# Altium PCB FOOTPRINT FOR UPPER PART V1.pcbdoc
Units mil, origin at the board's own origin, x right, y up, seen from the top; angles counter-clockwise.
Board outline 3689 x 6257.1 mil, 2 copper layers (Top Layer, Bottom Layer), stack 62.2 mil thick; 1 components, 0 nets, 0 pads, 0 vias.
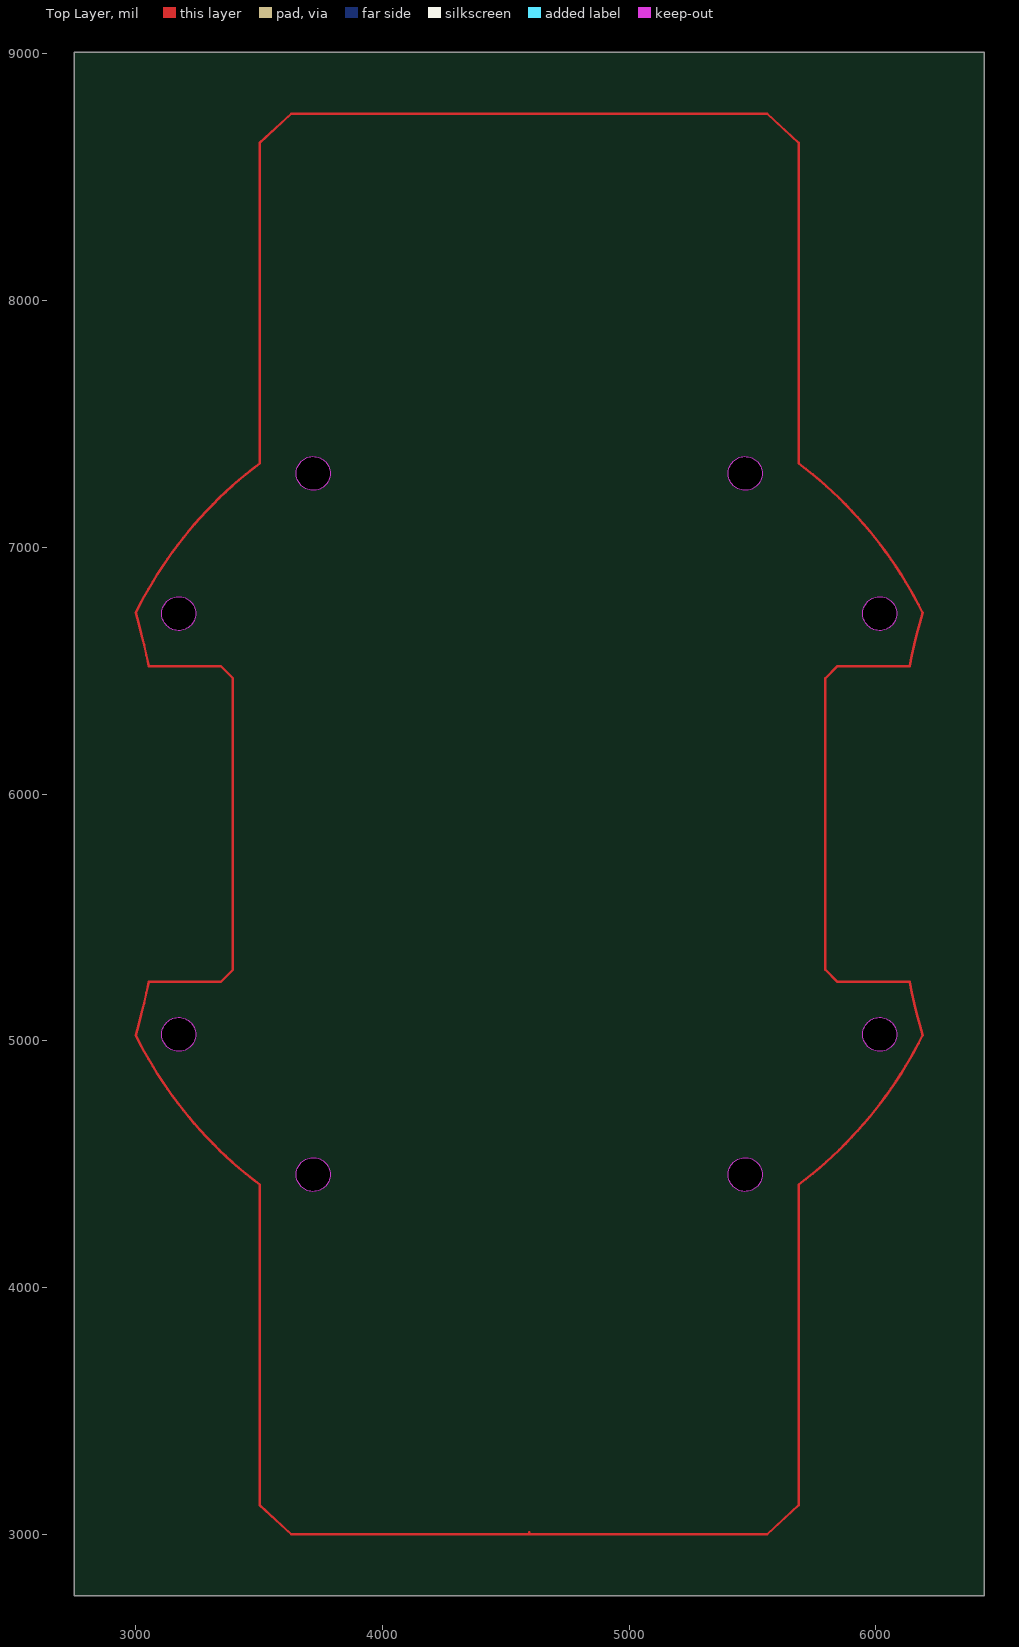
[diagram p0: Top Layer view]
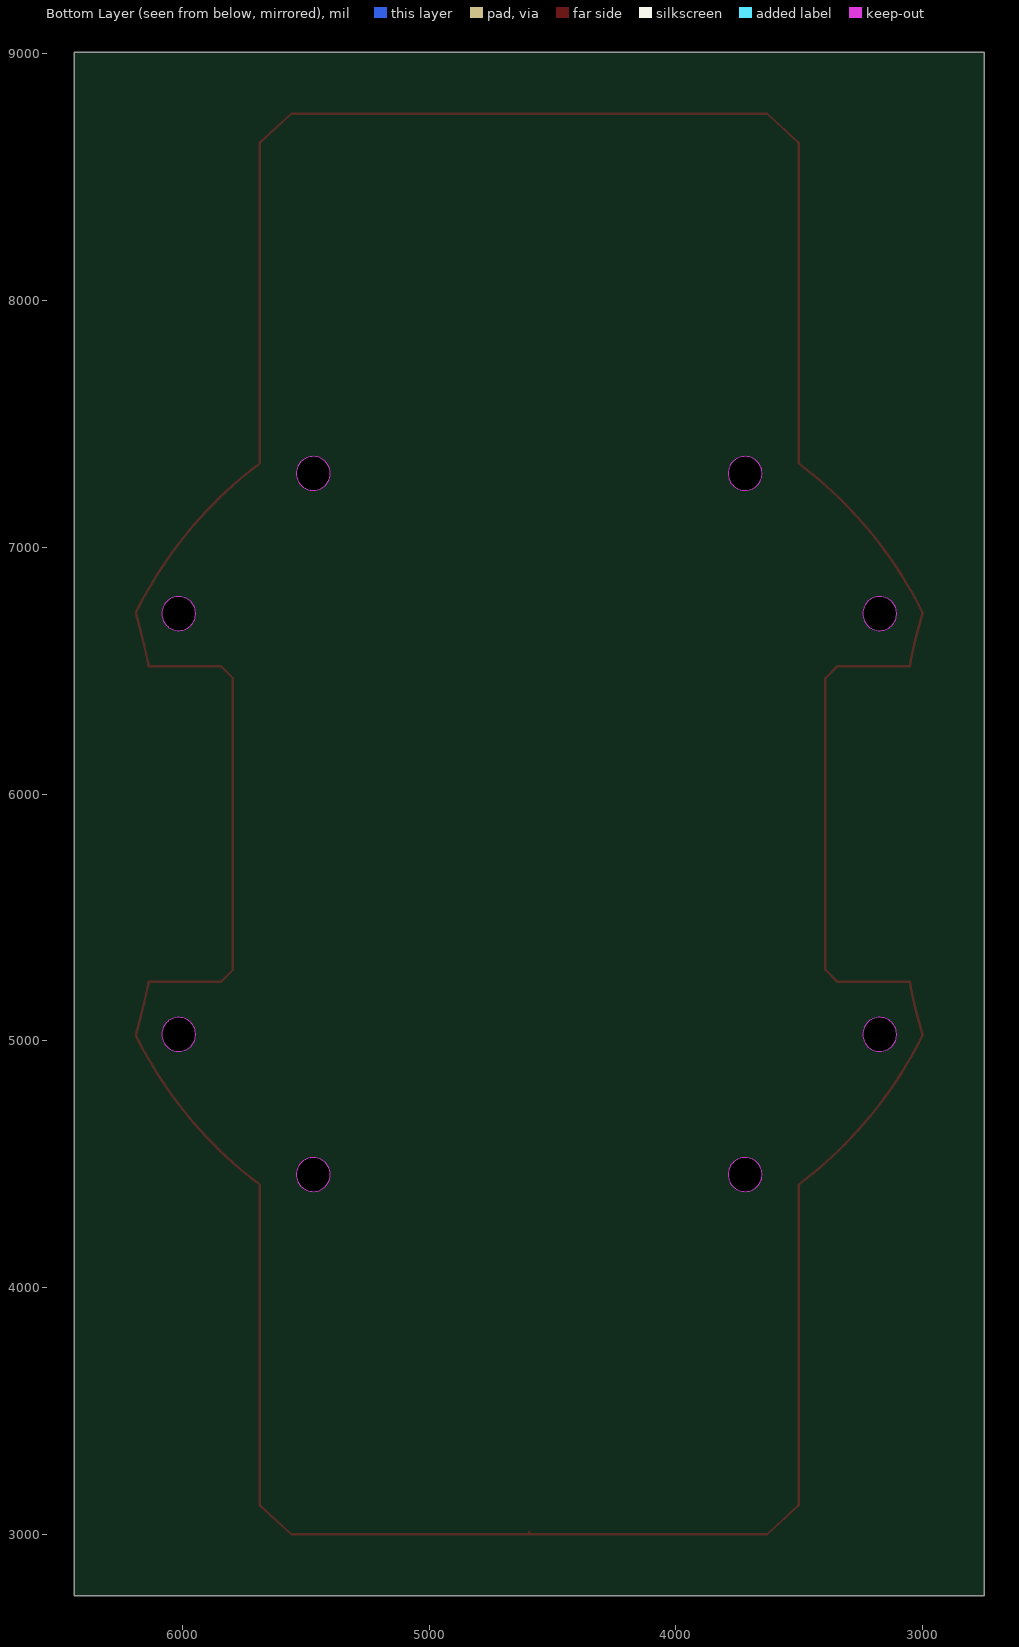
[diagram p1: Bottom Layer view, seen from below]

## Layer stack, top to bottom
Top Solder Mask Layer: solder mask 0.4, Dk 3.3
Top Layer: signal copper 1.4
Dielectric1: surface 59.4, FR4, Dk 4.5
Bottom Layer: signal copper 1.4
Bottom Solder Mask Layer: solder mask 0.4, Dk 3.3

## Board outline
6439,2750 2750,2750 2750,9007.1 6439,9007.1

## Components (designator, comment, footprint, x,y, rotation, side; value= is the part's Value field where it differs from the comment)
? "" "FOOTPRINT FOR UPPER PART V1" 4043.7,7478 r0 top

## Footprints (in the part's own frame and the unit in brackets; to place one, negate y for a bottom-side part, rotate by r counter-clockwise, add the part's x,y. Pads: shape width x height; smd on the part's side, far side on the other; paste and mask are expansions set on the pad)
"FOOTPRINT FOR UPPER PART V1" [mil]
  Top Layer lines w10: 550.8,-4469.7 550.8,-4478 ; 550.8,-4478 1515.4,-4478 1643.3,-4359.9 1643.3,-3060.7 1671.9,-3038.7 1700,-3016.1 1727.6,-2992.9 1754.7,-2969.2 1781.4,-2944.9 1807.4,-2920 1833,-2894.6 1858,-2868.6 1882.5,-2842.1 1906.4,-2815.1 1929.7,-2787.6 1952.4,-2759.6 1974.6,-2731.1 1996.1,-2702.2 2017,-2672.8 2037.3,-2643 2056.9,-2612.8 2075.9,-2582.1 2094.2,-2551.1 2111.9,-2519.7 2128.9,-2487.9 2145.3,-2455.8 2133.5,-2412.8 2122.4,-2369.6 2111.8,-2326.3 2101.9,-2282.8 2092.5,-2239.2 1800.8,-2239.2 1751.6,-2190 1751.6,-1599.5 1751.6,-1008.9 1800.8,-959.7 2092.5,-959.7 2101.9,-916.1 2111.8,-872.6 2122.3,-829.3 2133.5,-786.2 2145.3,-743.2 2128.9,-711 2111.9,-679.2 2094.2,-647.8 2075.9,-616.8 2056.9,-586.1 2037.3,-555.9 2017,-526.1 1996.1,-496.7 1974.6,-467.8 1952.4,-439.3 1929.7,-411.3 1906.4,-383.8 1882.5,-356.8 1858,-330.3 1833,-304.4 1807.4,-278.9 1781.4,-254.1 1754.7,-229.7 1727.6,-206 1700,-182.8 1671.9,-160.2 1643.3,-138.2 1643.3,1161 1515.4,1279.1 550.8,1279.1 -413.8,1279.1 -541.7,1161 -541.7,-138.2 -570.3,-160.2 -598.4,-182.8 -626,-206 -653.2,-229.7 -679.8,-254.1 -705.9,-278.9 -731.4,-304.4 -756.4,-330.3 -780.9,-356.8 -804.8,-383.8 -828.1,-411.3 -850.9,-439.3 -873,-467.8 -894.5,-496.7 -915.4,-526.1 -935.7,-555.9 -955.3,-586.1 -974.3,-616.8 -992.7,-647.8 -1010.4,-679.2 -1027.4,-711 -1043.7,-743.2 -1031.9,-786.2 -1020.8,-829.3 -1010.2,-872.6 -1000.3,-916.1 -990.9,-959.7 -699.2,-959.7 -650,-1008.9 -650,-1599.5 -650,-2190 -699.2,-2239.2 -990.9,-2239.2 -1000.3,-2282.8 -1010.2,-2326.3 -1020.8,-2369.6 -1031.9,-2412.8 -1043.7,-2455.8 -1027.3,-2487.9 -1010.3,-2519.7 -992.6,-2551.1 -974.3,-2582.1 -955.3,-2612.8 -935.6,-2643 -915.3,-2672.8 -894.4,-2702.2 -872.9,-2731.1 -850.8,-2759.5 -828,-2787.5 -804.7,-2815 -780.8,-2842 -756.4,-2868.5 -731.4,-2894.5 -705.8,-2919.9 -679.7,-2944.8 -653.1,-2969.1 -626,-2992.9 -598.4,-3016.1 -570.3,-3038.7 -541.7,-3060.7 -541.7,-4359.9 -413.8,-4478 550.8,-4478
  Board Outline Layer lines w0.1: -938.5,-2455.9 -937.7,-2463.2 -936.2,-2470.4 -933.9,-2477.3 -930.9,-2484 -927.1,-2490.3 -922.8,-2496.2 -917.8,-2501.6 -912.3,-2506.4 -906.3,-2510.6 -899.8,-2514.2 -893.1,-2517 -886.1,-2519.2 -878.9,-2520.5 -871.6,-2521.1 -864.2,-2520.9 -857,-2519.9 -849.8,-2518.2 -842.9,-2515.7 -836.3,-2512.5 -830.1,-2508.6 -824.3,-2504.1 -819.1,-2499 -814.4,-2493.3 -810.4,-2487.2 -807,-2480.7 -804.3,-2473.9 -802.4,-2466.8 -801.2,-2459.6 -800.8,-2452.2 -801.2,-2444.9 -802.4,-2437.7 -804.3,-2430.6 -807,-2423.8 -810.4,-2417.3 -814.4,-2411.1 -819.1,-2405.5 -824.3,-2400.4 -830.1,-2395.8 -836.3,-2392 -842.9,-2388.8 -849.8,-2386.3 -857,-2384.5 -864.2,-2383.6 -871.6,-2383.4 -878.9,-2383.9 -886.1,-2385.3 -893.1,-2387.4 -899.8,-2390.3 -906.3,-2393.8 -912.3,-2398 -917.8,-2402.9 -922.8,-2408.3 -927.1,-2414.1 -930.9,-2420.5 -933.9,-2427.1 -936.2,-2434.1 -937.7,-2441.3 -938.5,-2448.6 -938.5,-2455.9 ; -938.5,-750.4 -937.7,-757.6 -936.2,-764.8 -933.9,-771.8 -930.9,-778.5 -927.1,-784.8 -922.8,-790.7 -917.8,-796 -912.3,-800.9 -906.3,-805.1 -899.8,-808.6 -893.1,-811.5 -886.1,-813.6 -878.9,-815 -871.6,-815.6 -864.2,-815.4 -857,-814.4 -849.8,-812.6 -842.9,-810.2 -836.3,-807 -830.1,-803.1 -824.3,-798.5 -819.1,-793.4 -814.4,-787.8 -810.4,-781.7 -807,-775.2 -804.3,-768.3 -802.4,-761.2 -801.2,-754 -800.8,-746.7 -801.2,-739.4 -802.4,-732.1 -804.3,-725 -807,-718.2 -810.4,-711.7 -814.4,-705.6 -819.1,-700 -824.3,-694.8 -830.1,-690.3 -836.3,-686.4 -842.9,-683.2 -849.8,-680.7 -857,-679 -864.2,-678 -871.6,-677.8 -878.9,-678.4 -886.1,-679.8 -893.1,-681.9 -899.8,-684.7 -906.3,-688.3 -912.3,-692.5 -917.8,-697.3 -922.8,-702.7 -927.1,-708.6 -930.9,-714.9 -933.9,-721.6 -936.2,-728.6 -937.7,-735.7 -938.5,-743 -938.5,-750.4 ; -393.2,-3023.9 -392.4,-3031.2 -390.9,-3038.4 -388.6,-3045.3 -385.6,-3052 -381.8,-3058.3 -377.5,-3064.2 -372.5,-3069.6 -367,-3074.4 -361,-3078.7 -354.5,-3082.2 -347.8,-3085.1 -340.8,-3087.2 -333.6,-3088.5 -326.2,-3089.1 -318.9,-3088.9 -311.6,-3088 -304.5,-3086.2 -297.6,-3083.7 -291,-3080.5 -284.8,-3076.6 -279,-3072.1 -273.8,-3067 -269.1,-3061.3 -265.1,-3055.2 -261.7,-3048.7 -259,-3041.9 -257.1,-3034.8 -255.9,-3027.6 -255.5,-3020.2 -255.9,-3012.9 -257.1,-3005.7 -259,-2998.6 -261.7,-2991.8 -265.1,-2985.3 -269.1,-2979.2 -273.8,-2973.5 -279,-2968.4 -284.8,-2963.9 -291,-2960 -297.6,-2956.8 -304.5,-2954.3 -311.6,-2952.5 -318.9,-2951.6 -326.2,-2951.4 -333.6,-2952 -340.8,-2953.3 -347.8,-2955.4 -354.5,-2958.3 -361,-2961.8 -367,-2966.1 -372.5,-2970.9 -377.5,-2976.3 -381.8,-2982.2 -385.6,-2988.5 -388.6,-2995.2 -390.9,-3002.1 -392.4,-3009.3 -393.2,-3016.6 -393.2,-3023.9 ; -393.2,-182.3 -392.4,-189.6 -390.9,-196.8 -388.6,-203.8 -385.6,-210.4 -381.8,-216.8 -377.5,-222.6 -372.5,-228 -367,-232.9 -361,-237.1 -354.5,-240.6 -347.8,-243.5 -340.8,-245.6 -333.6,-247 -326.2,-247.5 -318.9,-247.3 -311.6,-246.4 -304.5,-244.6 -297.6,-242.1 -291,-238.9 -284.8,-235 -279,-230.5 -273.8,-225.4 -269.1,-219.8 -265.1,-213.6 -261.7,-207.1 -259,-200.3 -257.1,-193.2 -255.9,-186 -255.5,-178.7 -255.9,-171.3 -257.1,-164.1 -259,-157 -261.7,-150.2 -265.1,-143.7 -269.1,-137.6 -273.8,-131.9 -279,-126.8 -284.8,-122.3 -291,-118.4 -297.6,-115.2 -304.5,-112.7 -311.6,-111 -318.9,-110 -326.2,-109.8 -333.6,-110.4 -340.8,-111.7 -347.8,-113.9 -354.5,-116.7 -361,-120.3 -367,-124.5 -372.5,-129.3 -377.5,-134.7 -381.8,-140.6 -385.6,-146.9 -388.6,-153.6 -390.9,-160.5 -392.4,-167.7 -393.2,-175 -393.2,-182.3 ; 1357.2,-3023.9 1358,-3031.2 1359.5,-3038.4 1361.8,-3045.3 1364.9,-3052 1368.6,-3058.3 1373,-3064.2 1377.9,-3069.6 1383.4,-3074.4 1389.4,-3078.7 1395.9,-3082.2 1402.6,-3085.1 1409.6,-3087.2 1416.8,-3088.5 1424.2,-3089.1 1431.5,-3088.9 1438.8,-3088 1445.9,-3086.2 1452.8,-3083.7 1459.4,-3080.5 1465.6,-3076.6 1471.4,-3072.1 1476.6,-3067 1481.3,-3061.3 1485.4,-3055.2 1488.7,-3048.7 1491.4,-3041.9 1493.3,-3034.8 1494.5,-3027.6 1494.9,-3020.2 1494.5,-3012.9 1493.3,-3005.7 1491.4,-2998.6 1488.7,-2991.8 1485.4,-2985.3 1481.3,-2979.2 1476.6,-2973.5 1471.4,-2968.4 1465.6,-2963.9 1459.4,-2960 1452.8,-2956.8 1445.9,-2954.3 1438.8,-2952.5 1431.5,-2951.6 1424.2,-2951.4 1416.8,-2952 1409.6,-2953.3 1402.6,-2955.4 1395.9,-2958.3 1389.4,-2961.8 1383.4,-2966.1 1377.9,-2970.9 1373,-2976.3 1368.6,-2982.2 1364.9,-2988.5 1361.8,-2995.2 1359.5,-3002.1 1358,-3009.3 1357.2,-3016.6 1357.2,-3023.9 ; 1357.2,-182.3 1358,-189.6 1359.5,-196.8 1361.8,-203.8 1364.9,-210.4 1368.6,-216.8 1373,-222.6 1377.9,-228 1383.4,-232.9 1389.4,-237.1 1395.9,-240.6 1402.6,-243.5 1409.6,-245.6 1416.8,-247 1424.2,-247.5 1431.5,-247.3 1438.8,-246.4 1445.9,-244.6 1452.8,-242.1 1459.4,-238.9 1465.6,-235 1471.4,-230.5 1476.6,-225.4 1481.3,-219.8 1485.4,-213.6 1488.7,-207.1 1491.4,-200.3 1493.3,-193.2 1494.5,-186 1494.9,-178.7 1494.5,-171.3 1493.3,-164.1 1491.4,-157 1488.7,-150.2 1485.4,-143.7 1481.3,-137.6 1476.6,-131.9 1471.4,-126.8 1465.6,-122.3 1459.4,-118.4 1452.8,-115.2 1445.9,-112.7 1438.8,-111 1431.5,-110 1424.2,-109.8 1416.8,-110.4 1409.6,-111.7 1402.6,-113.9 1395.9,-116.7 1389.4,-120.3 1383.4,-124.5 1377.9,-129.3 1373,-134.7 1368.6,-140.6 1364.9,-146.9 1361.8,-153.6 1359.5,-160.5 1358,-167.7 1357.2,-175 1357.2,-182.3 ; 1902.5,-2455.9 1903.3,-2463.2 1904.8,-2470.4 1907.1,-2477.3 1910.2,-2484 1913.9,-2490.3 1918.3,-2496.2 1923.2,-2501.6 1928.7,-2506.4 1934.7,-2510.6 1941.2,-2514.2 1947.9,-2517 1954.9,-2519.2 1962.1,-2520.5 1969.5,-2521.1 1976.8,-2520.9 1984.1,-2519.9 1991.2,-2518.2 1998.1,-2515.7 2004.7,-2512.5 2010.9,-2508.6 2016.7,-2504.1 2021.9,-2499 2026.6,-2493.3 2030.7,-2487.2 2034,-2480.7 2036.7,-2473.9 2038.6,-2466.8 2039.8,-2459.6 2040.2,-2452.2 2039.8,-2444.9 2038.6,-2437.7 2036.7,-2430.6 2034,-2423.8 2030.7,-2417.3 2026.6,-2411.1 2021.9,-2405.5 2016.7,-2400.4 2010.9,-2395.8 2004.7,-2392 1998.1,-2388.8 1991.2,-2386.3 1984.1,-2384.5 1976.8,-2383.6 1969.5,-2383.4 1962.1,-2383.9 1954.9,-2385.3 1947.9,-2387.4 1941.2,-2390.3 1934.7,-2393.8 1928.7,-2398 1923.2,-2402.9 1918.3,-2408.3 1913.9,-2414.1 1910.2,-2420.5 1907.1,-2427.1 1904.8,-2434.1 1903.3,-2441.3 1902.5,-2448.6 1902.5,-2455.9 ; 1902.5,-750.4 1903.3,-757.6 1904.8,-764.8 1907.1,-771.8 1910.2,-778.5 1913.9,-784.8 1918.3,-790.7 1923.2,-796 1928.7,-800.9 1934.7,-805.1 1941.2,-808.6 1947.9,-811.5 1954.9,-813.6 1962.1,-815 1969.5,-815.6 1976.8,-815.4 1984.1,-814.4 1991.2,-812.6 1998.1,-810.2 2004.7,-807 2010.9,-803.1 2016.7,-798.5 2021.9,-793.4 2026.6,-787.8 2030.7,-781.7 2034,-775.2 2036.7,-768.3 2038.6,-761.2 2039.8,-754 2040.2,-746.7 2039.8,-739.4 2038.6,-732.1 2036.7,-725 2034,-718.2 2030.7,-711.7 2026.6,-705.6 2021.9,-700 2016.7,-694.8 2010.9,-690.3 2004.7,-686.4 1998.1,-683.2 1991.2,-680.7 1984.1,-679 1976.8,-678 1969.5,-677.8 1962.1,-678.4 1954.9,-679.8 1947.9,-681.9 1941.2,-684.7 1934.7,-688.3 1928.7,-692.5 1923.2,-697.3 1918.3,-702.7 1913.9,-708.6 1910.2,-714.9 1907.1,-721.6 1904.8,-728.6 1903.3,-735.7 1902.5,-743 1902.5,-750.4
  Board Outline Layer region: -800.8,-2452.2 -801.2,-2459.6 -802.4,-2466.8 -804.3,-2473.9 -807,-2480.7 -810.4,-2487.2 -814.4,-2493.3 -819.1,-2499 -824.3,-2504.1 -830.1,-2508.6 -836.3,-2512.5 -842.9,-2515.7 -849.8,-2518.2 -857,-2519.9 -864.2,-2520.9 -871.6,-2521.1 -878.9,-2520.5 -886.1,-2519.2 -893.1,-2517 -899.8,-2514.2 -906.3,-2510.6 -912.3,-2506.4 -917.8,-2501.6 -922.8,-2496.2 -927.1,-2490.3 -930.9,-2484 -933.9,-2477.3 -936.2,-2470.4 -937.7,-2463.2 -938.5,-2455.9 -938.5,-2448.6 -937.7,-2441.3 -936.2,-2434.1 -933.9,-2427.1 -930.9,-2420.5 -927.1,-2414.1 -922.8,-2408.3 -917.8,-2402.9 -912.3,-2398 -906.3,-2393.8 -899.8,-2390.3 -893.1,-2387.4 -886.1,-2385.3 -878.9,-2383.9 -871.6,-2383.4 -864.2,-2383.6 -857,-2384.5 -849.8,-2386.3 -842.9,-2388.8 -836.3,-2392 -830.1,-2395.8 -824.3,-2400.4 -819.1,-2405.5 -814.4,-2411.1 -810.4,-2417.3 -807,-2423.8 -804.3,-2430.6 -802.4,-2437.7 -801.2,-2444.9
  Board Outline Layer region: -800.8,-2452.2 -801.2,-2459.6 -802.4,-2466.8 -804.3,-2473.9 -807,-2480.7 -810.4,-2487.2 -814.4,-2493.3 -819.1,-2499 -824.3,-2504.1 -830.1,-2508.6 -836.3,-2512.5 -842.9,-2515.7 -849.8,-2518.2 -857,-2519.9 -864.2,-2520.9 -871.6,-2521.1 -878.9,-2520.5 -886.1,-2519.2 -893.1,-2517 -899.8,-2514.2 -906.3,-2510.6 -912.3,-2506.4 -917.8,-2501.6 -922.8,-2496.2 -927.1,-2490.3 -930.9,-2484 -933.9,-2477.3 -936.2,-2470.4 -937.7,-2463.2 -938.5,-2455.9 -938.5,-2448.6 -937.7,-2441.3 -936.2,-2434.1 -933.9,-2427.1 -930.9,-2420.5 -927.1,-2414.1 -922.8,-2408.3 -917.8,-2402.9 -912.3,-2398 -906.3,-2393.8 -899.8,-2390.3 -893.1,-2387.4 -886.1,-2385.3 -878.9,-2383.9 -871.6,-2383.4 -864.2,-2383.6 -857,-2384.5 -849.8,-2386.3 -842.9,-2388.8 -836.3,-2392 -830.1,-2395.8 -824.3,-2400.4 -819.1,-2405.5 -814.4,-2411.1 -810.4,-2417.3 -807,-2423.8 -804.3,-2430.6 -802.4,-2437.7 -801.2,-2444.9
  Board Outline Layer region: -800.8,-746.7 -801.2,-754 -802.4,-761.2 -804.3,-768.3 -807,-775.2 -810.4,-781.7 -814.4,-787.8 -819.1,-793.4 -824.3,-798.5 -830.1,-803.1 -836.3,-807 -842.9,-810.2 -849.8,-812.6 -857,-814.4 -864.2,-815.4 -871.6,-815.6 -878.9,-815 -886.1,-813.6 -893.1,-811.5 -899.8,-808.6 -906.3,-805.1 -912.3,-800.9 -917.8,-796 -922.8,-790.7 -927.1,-784.8 -930.9,-778.5 -933.9,-771.8 -936.2,-764.8 -937.7,-757.6 -938.5,-750.4 -938.5,-743 -937.7,-735.7 -936.2,-728.6 -933.9,-721.6 -930.9,-714.9 -927.1,-708.6 -922.8,-702.7 -917.8,-697.3 -912.3,-692.5 -906.3,-688.3 -899.8,-684.7 -893.1,-681.9 -886.1,-679.8 -878.9,-678.4 -871.6,-677.8 -864.2,-678 -857,-679 -849.8,-680.7 -842.9,-683.2 -836.3,-686.4 -830.1,-690.3 -824.3,-694.8 -819.1,-700 -814.4,-705.6 -810.4,-711.7 -807,-718.2 -804.3,-725 -802.4,-732.1 -801.2,-739.4
  Board Outline Layer region: -800.8,-746.7 -801.2,-754 -802.4,-761.2 -804.3,-768.3 -807,-775.2 -810.4,-781.7 -814.4,-787.8 -819.1,-793.4 -824.3,-798.5 -830.1,-803.1 -836.3,-807 -842.9,-810.2 -849.8,-812.6 -857,-814.4 -864.2,-815.4 -871.6,-815.6 -878.9,-815 -886.1,-813.6 -893.1,-811.5 -899.8,-808.6 -906.3,-805.1 -912.3,-800.9 -917.8,-796 -922.8,-790.7 -927.1,-784.8 -930.9,-778.5 -933.9,-771.8 -936.2,-764.8 -937.7,-757.6 -938.5,-750.4 -938.5,-743 -937.7,-735.7 -936.2,-728.6 -933.9,-721.6 -930.9,-714.9 -927.1,-708.6 -922.8,-702.7 -917.8,-697.3 -912.3,-692.5 -906.3,-688.3 -899.8,-684.7 -893.1,-681.9 -886.1,-679.8 -878.9,-678.4 -871.6,-677.8 -864.2,-678 -857,-679 -849.8,-680.7 -842.9,-683.2 -836.3,-686.4 -830.1,-690.3 -824.3,-694.8 -819.1,-700 -814.4,-705.6 -810.4,-711.7 -807,-718.2 -804.3,-725 -802.4,-732.1 -801.2,-739.4
  Board Outline Layer region: -255.5,-178.7 -255.9,-186 -257.1,-193.2 -259,-200.3 -261.7,-207.1 -265.1,-213.6 -269.1,-219.8 -273.8,-225.4 -279,-230.5 -284.8,-235 -291,-238.9 -297.6,-242.1 -304.5,-244.6 -311.6,-246.4 -318.9,-247.3 -326.2,-247.5 -333.6,-247 -340.8,-245.6 -347.8,-243.5 -354.5,-240.6 -361,-237.1 -367,-232.9 -372.5,-228 -377.5,-222.6 -381.8,-216.8 -385.6,-210.4 -388.6,-203.8 -390.9,-196.8 -392.4,-189.6 -393.2,-182.3 -393.2,-175 -392.4,-167.7 -390.9,-160.5 -388.6,-153.6 -385.6,-146.9 -381.8,-140.6 -377.5,-134.7 -372.5,-129.3 -367,-124.5 -361,-120.3 -354.5,-116.7 -347.8,-113.9 -340.8,-111.7 -333.6,-110.4 -326.2,-109.8 -318.9,-110 -311.6,-111 -304.5,-112.7 -297.6,-115.2 -291,-118.4 -284.8,-122.3 -279,-126.8 -273.8,-131.9 -269.1,-137.6 -265.1,-143.7 -261.7,-150.2 -259,-157 -257.1,-164.1 -255.9,-171.3
  Board Outline Layer region: -255.5,-178.7 -255.9,-186 -257.1,-193.2 -259,-200.3 -261.7,-207.1 -265.1,-213.6 -269.1,-219.8 -273.8,-225.4 -279,-230.5 -284.8,-235 -291,-238.9 -297.6,-242.1 -304.5,-244.6 -311.6,-246.4 -318.9,-247.3 -326.2,-247.5 -333.6,-247 -340.8,-245.6 -347.8,-243.5 -354.5,-240.6 -361,-237.1 -367,-232.9 -372.5,-228 -377.5,-222.6 -381.8,-216.8 -385.6,-210.4 -388.6,-203.8 -390.9,-196.8 -392.4,-189.6 -393.2,-182.3 -393.2,-175 -392.4,-167.7 -390.9,-160.5 -388.6,-153.6 -385.6,-146.9 -381.8,-140.6 -377.5,-134.7 -372.5,-129.3 -367,-124.5 -361,-120.3 -354.5,-116.7 -347.8,-113.9 -340.8,-111.7 -333.6,-110.4 -326.2,-109.8 -318.9,-110 -311.6,-111 -304.5,-112.7 -297.6,-115.2 -291,-118.4 -284.8,-122.3 -279,-126.8 -273.8,-131.9 -269.1,-137.6 -265.1,-143.7 -261.7,-150.2 -259,-157 -257.1,-164.1 -255.9,-171.3
  Board Outline Layer region: 1494.9,-178.7 1494.5,-186 1493.3,-193.2 1491.4,-200.3 1488.7,-207.1 1485.4,-213.6 1481.3,-219.8 1476.6,-225.4 1471.4,-230.5 1465.6,-235 1459.4,-238.9 1452.8,-242.1 1445.9,-244.6 1438.8,-246.4 1431.5,-247.3 1424.2,-247.5 1416.8,-247 1409.6,-245.6 1402.6,-243.5 1395.9,-240.6 1389.4,-237.1 1383.4,-232.9 1377.9,-228 1373,-222.6 1368.6,-216.8 1364.9,-210.4 1361.8,-203.8 1359.5,-196.8 1358,-189.6 1357.2,-182.3 1357.2,-175 1358,-167.7 1359.5,-160.5 1361.8,-153.6 1364.9,-146.9 1368.6,-140.6 1373,-134.7 1377.9,-129.3 1383.4,-124.5 1389.4,-120.3 1395.9,-116.7 1402.6,-113.9 1409.6,-111.7 1416.8,-110.4 1424.2,-109.8 1431.5,-110 1438.8,-111 1445.9,-112.7 1452.8,-115.2 1459.4,-118.4 1465.6,-122.3 1471.4,-126.8 1476.6,-131.9 1481.3,-137.6 1485.4,-143.7 1488.7,-150.2 1491.4,-157 1493.3,-164.1 1494.5,-171.3
  Board Outline Layer region: 1494.9,-178.7 1494.5,-186 1493.3,-193.2 1491.4,-200.3 1488.7,-207.1 1485.4,-213.6 1481.3,-219.8 1476.6,-225.4 1471.4,-230.5 1465.6,-235 1459.4,-238.9 1452.8,-242.1 1445.9,-244.6 1438.8,-246.4 1431.5,-247.3 1424.2,-247.5 1416.8,-247 1409.6,-245.6 1402.6,-243.5 1395.9,-240.6 1389.4,-237.1 1383.4,-232.9 1377.9,-228 1373,-222.6 1368.6,-216.8 1364.9,-210.4 1361.8,-203.8 1359.5,-196.8 1358,-189.6 1357.2,-182.3 1357.2,-175 1358,-167.7 1359.5,-160.5 1361.8,-153.6 1364.9,-146.9 1368.6,-140.6 1373,-134.7 1377.9,-129.3 1383.4,-124.5 1389.4,-120.3 1395.9,-116.7 1402.6,-113.9 1409.6,-111.7 1416.8,-110.4 1424.2,-109.8 1431.5,-110 1438.8,-111 1445.9,-112.7 1452.8,-115.2 1459.4,-118.4 1465.6,-122.3 1471.4,-126.8 1476.6,-131.9 1481.3,-137.6 1485.4,-143.7 1488.7,-150.2 1491.4,-157 1493.3,-164.1 1494.5,-171.3
  Board Outline Layer region: 2040.2,-746.7 2039.8,-754 2038.6,-761.2 2036.7,-768.3 2034,-775.2 2030.7,-781.7 2026.6,-787.8 2021.9,-793.4 2016.7,-798.5 2010.9,-803.1 2004.7,-807 1998.1,-810.2 1991.2,-812.6 1984.1,-814.4 1976.8,-815.4 1969.5,-815.6 1962.1,-815 1954.9,-813.6 1947.9,-811.5 1941.2,-808.6 1934.7,-805.1 1928.7,-800.9 1923.2,-796 1918.3,-790.7 1913.9,-784.8 1910.2,-778.5 1907.1,-771.8 1904.8,-764.8 1903.3,-757.6 1902.5,-750.4 1902.5,-743 1903.3,-735.7 1904.8,-728.6 1907.1,-721.6 1910.2,-714.9 1913.9,-708.6 1918.3,-702.7 1923.2,-697.3 1928.7,-692.5 1934.7,-688.3 1941.2,-684.7 1947.9,-681.9 1954.9,-679.8 1962.1,-678.4 1969.5,-677.8 1976.8,-678 1984.1,-679 1991.2,-680.7 1998.1,-683.2 2004.7,-686.4 2010.9,-690.3 2016.7,-694.8 2021.9,-700 2026.6,-705.6 2030.7,-711.7 2034,-718.2 2036.7,-725 2038.6,-732.1 2039.8,-739.4
  Board Outline Layer region: 2040.2,-746.7 2039.8,-754 2038.6,-761.2 2036.7,-768.3 2034,-775.2 2030.7,-781.7 2026.6,-787.8 2021.9,-793.4 2016.7,-798.5 2010.9,-803.1 2004.7,-807 1998.1,-810.2 1991.2,-812.6 1984.1,-814.4 1976.8,-815.4 1969.5,-815.6 1962.1,-815 1954.9,-813.6 1947.9,-811.5 1941.2,-808.6 1934.7,-805.1 1928.7,-800.9 1923.2,-796 1918.3,-790.7 1913.9,-784.8 1910.2,-778.5 1907.1,-771.8 1904.8,-764.8 1903.3,-757.6 1902.5,-750.4 1902.5,-743 1903.3,-735.7 1904.8,-728.6 1907.1,-721.6 1910.2,-714.9 1913.9,-708.6 1918.3,-702.7 1923.2,-697.3 1928.7,-692.5 1934.7,-688.3 1941.2,-684.7 1947.9,-681.9 1954.9,-679.8 1962.1,-678.4 1969.5,-677.8 1976.8,-678 1984.1,-679 1991.2,-680.7 1998.1,-683.2 2004.7,-686.4 2010.9,-690.3 2016.7,-694.8 2021.9,-700 2026.6,-705.6 2030.7,-711.7 2034,-718.2 2036.7,-725 2038.6,-732.1 2039.8,-739.4
  Board Outline Layer region: 2040.2,-2452.2 2039.8,-2459.6 2038.6,-2466.8 2036.7,-2473.9 2034,-2480.7 2030.7,-2487.2 2026.6,-2493.3 2021.9,-2499 2016.7,-2504.1 2010.9,-2508.6 2004.7,-2512.5 1998.1,-2515.7 1991.2,-2518.2 1984.1,-2519.9 1976.8,-2520.9 1969.5,-2521.1 1962.1,-2520.5 1954.9,-2519.2 1947.9,-2517 1941.2,-2514.2 1934.7,-2510.6 1928.7,-2506.4 1923.2,-2501.6 1918.3,-2496.2 1913.9,-2490.3 1910.2,-2484 1907.1,-2477.3 1904.8,-2470.4 1903.3,-2463.2 1902.5,-2455.9 1902.5,-2448.6 1903.3,-2441.3 1904.8,-2434.1 1907.1,-2427.1 1910.2,-2420.5 1913.9,-2414.1 1918.3,-2408.3 1923.2,-2402.9 1928.7,-2398 1934.7,-2393.8 1941.2,-2390.3 1947.9,-2387.4 1954.9,-2385.3 1962.1,-2383.9 1969.5,-2383.4 1976.8,-2383.6 1984.1,-2384.5 1991.2,-2386.3 1998.1,-2388.8 2004.7,-2392 2010.9,-2395.8 2016.7,-2400.4 2021.9,-2405.5 2026.6,-2411.1 2030.7,-2417.3 2034,-2423.8 2036.7,-2430.6 2038.6,-2437.7 2039.8,-2444.9
  Board Outline Layer region: 2040.2,-2452.2 2039.8,-2459.6 2038.6,-2466.8 2036.7,-2473.9 2034,-2480.7 2030.7,-2487.2 2026.6,-2493.3 2021.9,-2499 2016.7,-2504.1 2010.9,-2508.6 2004.7,-2512.5 1998.1,-2515.7 1991.2,-2518.2 1984.1,-2519.9 1976.8,-2520.9 1969.5,-2521.1 1962.1,-2520.5 1954.9,-2519.2 1947.9,-2517 1941.2,-2514.2 1934.7,-2510.6 1928.7,-2506.4 1923.2,-2501.6 1918.3,-2496.2 1913.9,-2490.3 1910.2,-2484 1907.1,-2477.3 1904.8,-2470.4 1903.3,-2463.2 1902.5,-2455.9 1902.5,-2448.6 1903.3,-2441.3 1904.8,-2434.1 1907.1,-2427.1 1910.2,-2420.5 1913.9,-2414.1 1918.3,-2408.3 1923.2,-2402.9 1928.7,-2398 1934.7,-2393.8 1941.2,-2390.3 1947.9,-2387.4 1954.9,-2385.3 1962.1,-2383.9 1969.5,-2383.4 1976.8,-2383.6 1984.1,-2384.5 1991.2,-2386.3 1998.1,-2388.8 2004.7,-2392 2010.9,-2395.8 2016.7,-2400.4 2021.9,-2405.5 2026.6,-2411.1 2030.7,-2417.3 2034,-2423.8 2036.7,-2430.6 2038.6,-2437.7 2039.8,-2444.9
  Board Outline Layer region: 1494.9,-3020.2 1494.5,-3027.6 1493.3,-3034.8 1491.4,-3041.9 1488.7,-3048.7 1485.4,-3055.2 1481.3,-3061.3 1476.6,-3067 1471.4,-3072.1 1465.6,-3076.6 1459.4,-3080.5 1452.8,-3083.7 1445.9,-3086.2 1438.8,-3088 1431.5,-3088.9 1424.2,-3089.1 1416.8,-3088.5 1409.6,-3087.2 1402.6,-3085.1 1395.9,-3082.2 1389.4,-3078.7 1383.4,-3074.4 1377.9,-3069.6 1373,-3064.2 1368.6,-3058.3 1364.9,-3052 1361.8,-3045.3 1359.5,-3038.4 1358,-3031.2 1357.2,-3023.9 1357.2,-3016.6 1358,-3009.3 1359.5,-3002.1 1361.8,-2995.2 1364.9,-2988.5 1368.6,-2982.2 1373,-2976.3 1377.9,-2970.9 1383.4,-2966.1 1389.4,-2961.8 1395.9,-2958.3 1402.6,-2955.4 1409.6,-2953.3 1416.8,-2952 1424.2,-2951.4 1431.5,-2951.6 1438.8,-2952.5 1445.9,-2954.3 1452.8,-2956.8 1459.4,-2960 1465.6,-2963.9 1471.4,-2968.4 1476.6,-2973.5 1481.3,-2979.2 1485.4,-2985.3 1488.7,-2991.8 1491.4,-2998.6 1493.3,-3005.7 1494.5,-3012.9
  Board Outline Layer region: 1494.9,-3020.2 1494.5,-3027.6 1493.3,-3034.8 1491.4,-3041.9 1488.7,-3048.7 1485.4,-3055.2 1481.3,-3061.3 1476.6,-3067 1471.4,-3072.1 1465.6,-3076.6 1459.4,-3080.5 1452.8,-3083.7 1445.9,-3086.2 1438.8,-3088 1431.5,-3088.9 1424.2,-3089.1 1416.8,-3088.5 1409.6,-3087.2 1402.6,-3085.1 1395.9,-3082.2 1389.4,-3078.7 1383.4,-3074.4 1377.9,-3069.6 1373,-3064.2 1368.6,-3058.3 1364.9,-3052 1361.8,-3045.3 1359.5,-3038.4 1358,-3031.2 1357.2,-3023.9 1357.2,-3016.6 1358,-3009.3 1359.5,-3002.1 1361.8,-2995.2 1364.9,-2988.5 1368.6,-2982.2 1373,-2976.3 1377.9,-2970.9 1383.4,-2966.1 1389.4,-2961.8 1395.9,-2958.3 1402.6,-2955.4 1409.6,-2953.3 1416.8,-2952 1424.2,-2951.4 1431.5,-2951.6 1438.8,-2952.5 1445.9,-2954.3 1452.8,-2956.8 1459.4,-2960 1465.6,-2963.9 1471.4,-2968.4 1476.6,-2973.5 1481.3,-2979.2 1485.4,-2985.3 1488.7,-2991.8 1491.4,-2998.6 1493.3,-3005.7 1494.5,-3012.9
  Board Outline Layer region: -255.5,-3020.2 -255.9,-3027.6 -257.1,-3034.8 -259,-3041.9 -261.7,-3048.7 -265.1,-3055.2 -269.1,-3061.3 -273.8,-3067 -279,-3072.1 -284.8,-3076.6 -291,-3080.5 -297.6,-3083.7 -304.5,-3086.2 -311.6,-3088 -318.9,-3088.9 -326.2,-3089.1 -333.6,-3088.5 -340.8,-3087.2 -347.8,-3085.1 -354.5,-3082.2 -361,-3078.7 -367,-3074.4 -372.5,-3069.6 -377.5,-3064.2 -381.8,-3058.3 -385.6,-3052 -388.6,-3045.3 -390.9,-3038.4 -392.4,-3031.2 -393.2,-3023.9 -393.2,-3016.6 -392.4,-3009.3 -390.9,-3002.1 -388.6,-2995.2 -385.6,-2988.5 -381.8,-2982.2 -377.5,-2976.3 -372.5,-2970.9 -367,-2966.1 -361,-2961.8 -354.5,-2958.3 -347.8,-2955.4 -340.8,-2953.3 -333.6,-2952 -326.2,-2951.4 -318.9,-2951.6 -311.6,-2952.5 -304.5,-2954.3 -297.6,-2956.8 -291,-2960 -284.8,-2963.9 -279,-2968.4 -273.8,-2973.5 -269.1,-2979.2 -265.1,-2985.3 -261.7,-2991.8 -259,-2998.6 -257.1,-3005.7 -255.9,-3012.9
  Board Outline Layer region: -255.5,-3020.2 -255.9,-3027.6 -257.1,-3034.8 -259,-3041.9 -261.7,-3048.7 -265.1,-3055.2 -269.1,-3061.3 -273.8,-3067 -279,-3072.1 -284.8,-3076.6 -291,-3080.5 -297.6,-3083.7 -304.5,-3086.2 -311.6,-3088 -318.9,-3088.9 -326.2,-3089.1 -333.6,-3088.5 -340.8,-3087.2 -347.8,-3085.1 -354.5,-3082.2 -361,-3078.7 -367,-3074.4 -372.5,-3069.6 -377.5,-3064.2 -381.8,-3058.3 -385.6,-3052 -388.6,-3045.3 -390.9,-3038.4 -392.4,-3031.2 -393.2,-3023.9 -393.2,-3016.6 -392.4,-3009.3 -390.9,-3002.1 -388.6,-2995.2 -385.6,-2988.5 -381.8,-2982.2 -377.5,-2976.3 -372.5,-2970.9 -367,-2966.1 -361,-2961.8 -354.5,-2958.3 -347.8,-2955.4 -340.8,-2953.3 -333.6,-2952 -326.2,-2951.4 -318.9,-2951.6 -311.6,-2952.5 -304.5,-2954.3 -297.6,-2956.8 -291,-2960 -284.8,-2963.9 -279,-2968.4 -273.8,-2973.5 -269.1,-2979.2 -265.1,-2985.3 -261.7,-2991.8 -259,-2998.6 -257.1,-3005.7 -255.9,-3012.9
  Multi-Layer board cut-out: -800.8,-2452.2 -801.2,-2459.6 -802.4,-2466.8 -804.3,-2473.9 -807,-2480.7 -810.4,-2487.2 -814.4,-2493.3 -819.1,-2499 -824.3,-2504.1 -830.1,-2508.6 -836.3,-2512.5 -842.9,-2515.7 -849.8,-2518.2 -857,-2519.9 -864.2,-2520.9 -871.6,-2521.1 -878.9,-2520.5 -886.1,-2519.2 -893.1,-2517 -899.8,-2514.2 -906.3,-2510.6 -912.3,-2506.4 -917.8,-2501.6 -922.8,-2496.2 -927.1,-2490.3 -930.9,-2484 -933.9,-2477.3 -936.2,-2470.4 -937.7,-2463.2 -938.5,-2455.9 -938.5,-2448.6 -937.7,-2441.3 -936.2,-2434.1 -933.9,-2427.1 -930.9,-2420.5 -927.1,-2414.1 -922.8,-2408.3 -917.8,-2402.9 -912.3,-2398 -906.3,-2393.8 -899.8,-2390.3 -893.1,-2387.4 -886.1,-2385.3 -878.9,-2383.9 -871.6,-2383.4 -864.2,-2383.6 -857,-2384.5 -849.8,-2386.3 -842.9,-2388.8 -836.3,-2392 -830.1,-2395.8 -824.3,-2400.4 -819.1,-2405.5 -814.4,-2411.1 -810.4,-2417.3 -807,-2423.8 -804.3,-2430.6 -802.4,-2437.7 -801.2,-2444.9
  Multi-Layer board cut-out: -800.8,-746.7 -801.2,-754 -802.4,-761.2 -804.3,-768.3 -807,-775.2 -810.4,-781.7 -814.4,-787.8 -819.1,-793.4 -824.3,-798.5 -830.1,-803.1 -836.3,-807 -842.9,-810.2 -849.8,-812.6 -857,-814.4 -864.2,-815.4 -871.6,-815.6 -878.9,-815 -886.1,-813.6 -893.1,-811.5 -899.8,-808.6 -906.3,-805.1 -912.3,-800.9 -917.8,-796 -922.8,-790.7 -927.1,-784.8 -930.9,-778.5 -933.9,-771.8 -936.2,-764.8 -937.7,-757.6 -938.5,-750.4 -938.5,-743 -937.7,-735.7 -936.2,-728.6 -933.9,-721.6 -930.9,-714.9 -927.1,-708.6 -922.8,-702.7 -917.8,-697.3 -912.3,-692.5 -906.3,-688.3 -899.8,-684.7 -893.1,-681.9 -886.1,-679.8 -878.9,-678.4 -871.6,-677.8 -864.2,-678 -857,-679 -849.8,-680.7 -842.9,-683.2 -836.3,-686.4 -830.1,-690.3 -824.3,-694.8 -819.1,-700 -814.4,-705.6 -810.4,-711.7 -807,-718.2 -804.3,-725 -802.4,-732.1 -801.2,-739.4
  Multi-Layer board cut-out: -255.5,-178.7 -255.9,-186 -257.1,-193.2 -259,-200.3 -261.7,-207.1 -265.1,-213.6 -269.1,-219.8 -273.8,-225.4 -279,-230.5 -284.8,-235 -291,-238.9 -297.6,-242.1 -304.5,-244.6 -311.6,-246.4 -318.9,-247.3 -326.2,-247.5 -333.6,-247 -340.8,-245.6 -347.8,-243.5 -354.5,-240.6 -361,-237.1 -367,-232.9 -372.5,-228 -377.5,-222.6 -381.8,-216.8 -385.6,-210.4 -388.6,-203.8 -390.9,-196.8 -392.4,-189.6 -393.2,-182.3 -393.2,-175 -392.4,-167.7 -390.9,-160.5 -388.6,-153.6 -385.6,-146.9 -381.8,-140.6 -377.5,-134.7 -372.5,-129.3 -367,-124.5 -361,-120.3 -354.5,-116.7 -347.8,-113.9 -340.8,-111.7 -333.6,-110.4 -326.2,-109.8 -318.9,-110 -311.6,-111 -304.5,-112.7 -297.6,-115.2 -291,-118.4 -284.8,-122.3 -279,-126.8 -273.8,-131.9 -269.1,-137.6 -265.1,-143.7 -261.7,-150.2 -259,-157 -257.1,-164.1 -255.9,-171.3
  Multi-Layer board cut-out: 1494.9,-178.7 1494.5,-186 1493.3,-193.2 1491.4,-200.3 1488.7,-207.1 1485.4,-213.6 1481.3,-219.8 1476.6,-225.4 1471.4,-230.5 1465.6,-235 1459.4,-238.9 1452.8,-242.1 1445.9,-244.6 1438.8,-246.4 1431.5,-247.3 1424.2,-247.5 1416.8,-247 1409.6,-245.6 1402.6,-243.5 1395.9,-240.6 1389.4,-237.1 1383.4,-232.9 1377.9,-228 1373,-222.6 1368.6,-216.8 1364.9,-210.4 1361.8,-203.8 1359.5,-196.8 1358,-189.6 1357.2,-182.3 1357.2,-175 1358,-167.7 1359.5,-160.5 1361.8,-153.6 1364.9,-146.9 1368.6,-140.6 1373,-134.7 1377.9,-129.3 1383.4,-124.5 1389.4,-120.3 1395.9,-116.7 1402.6,-113.9 1409.6,-111.7 1416.8,-110.4 1424.2,-109.8 1431.5,-110 1438.8,-111 1445.9,-112.7 1452.8,-115.2 1459.4,-118.4 1465.6,-122.3 1471.4,-126.8 1476.6,-131.9 1481.3,-137.6 1485.4,-143.7 1488.7,-150.2 1491.4,-157 1493.3,-164.1 1494.5,-171.3
  Multi-Layer board cut-out: 2040.2,-746.7 2039.8,-754 2038.6,-761.2 2036.7,-768.3 2034,-775.2 2030.7,-781.7 2026.6,-787.8 2021.9,-793.4 2016.7,-798.5 2010.9,-803.1 2004.7,-807 1998.1,-810.2 1991.2,-812.6 1984.1,-814.4 1976.8,-815.4 1969.5,-815.6 1962.1,-815 1954.9,-813.6 1947.9,-811.5 1941.2,-808.6 1934.7,-805.1 1928.7,-800.9 1923.2,-796 1918.3,-790.7 1913.9,-784.8 1910.2,-778.5 1907.1,-771.8 1904.8,-764.8 1903.3,-757.6 1902.5,-750.4 1902.5,-743 1903.3,-735.7 1904.8,-728.6 1907.1,-721.6 1910.2,-714.9 1913.9,-708.6 1918.3,-702.7 1923.2,-697.3 1928.7,-692.5 1934.7,-688.3 1941.2,-684.7 1947.9,-681.9 1954.9,-679.8 1962.1,-678.4 1969.5,-677.8 1976.8,-678 1984.1,-679 1991.2,-680.7 1998.1,-683.2 2004.7,-686.4 2010.9,-690.3 2016.7,-694.8 2021.9,-700 2026.6,-705.6 2030.7,-711.7 2034,-718.2 2036.7,-725 2038.6,-732.1 2039.8,-739.4
  Multi-Layer board cut-out: 2040.2,-2452.2 2039.8,-2459.6 2038.6,-2466.8 2036.7,-2473.9 2034,-2480.7 2030.7,-2487.2 2026.6,-2493.3 2021.9,-2499 2016.7,-2504.1 2010.9,-2508.6 2004.7,-2512.5 1998.1,-2515.7 1991.2,-2518.2 1984.1,-2519.9 1976.8,-2520.9 1969.5,-2521.1 1962.1,-2520.5 1954.9,-2519.2 1947.9,-2517 1941.2,-2514.2 1934.7,-2510.6 1928.7,-2506.4 1923.2,-2501.6 1918.3,-2496.2 1913.9,-2490.3 1910.2,-2484 1907.1,-2477.3 1904.8,-2470.4 1903.3,-2463.2 1902.5,-2455.9 1902.5,-2448.6 1903.3,-2441.3 1904.8,-2434.1 1907.1,-2427.1 1910.2,-2420.5 1913.9,-2414.1 1918.3,-2408.3 1923.2,-2402.9 1928.7,-2398 1934.7,-2393.8 1941.2,-2390.3 1947.9,-2387.4 1954.9,-2385.3 1962.1,-2383.9 1969.5,-2383.4 1976.8,-2383.6 1984.1,-2384.5 1991.2,-2386.3 1998.1,-2388.8 2004.7,-2392 2010.9,-2395.8 2016.7,-2400.4 2021.9,-2405.5 2026.6,-2411.1 2030.7,-2417.3 2034,-2423.8 2036.7,-2430.6 2038.6,-2437.7 2039.8,-2444.9
  Multi-Layer board cut-out: 1494.9,-3020.2 1494.5,-3027.6 1493.3,-3034.8 1491.4,-3041.9 1488.7,-3048.7 1485.4,-3055.2 1481.3,-3061.3 1476.6,-3067 1471.4,-3072.1 1465.6,-3076.6 1459.4,-3080.5 1452.8,-3083.7 1445.9,-3086.2 1438.8,-3088 1431.5,-3088.9 1424.2,-3089.1 1416.8,-3088.5 1409.6,-3087.2 1402.6,-3085.1 1395.9,-3082.2 1389.4,-3078.7 1383.4,-3074.4 1377.9,-3069.6 1373,-3064.2 1368.6,-3058.3 1364.9,-3052 1361.8,-3045.3 1359.5,-3038.4 1358,-3031.2 1357.2,-3023.9 1357.2,-3016.6 1358,-3009.3 1359.5,-3002.1 1361.8,-2995.2 1364.9,-2988.5 1368.6,-2982.2 1373,-2976.3 1377.9,-2970.9 1383.4,-2966.1 1389.4,-2961.8 1395.9,-2958.3 1402.6,-2955.4 1409.6,-2953.3 1416.8,-2952 1424.2,-2951.4 1431.5,-2951.6 1438.8,-2952.5 1445.9,-2954.3 1452.8,-2956.8 1459.4,-2960 1465.6,-2963.9 1471.4,-2968.4 1476.6,-2973.5 1481.3,-2979.2 1485.4,-2985.3 1488.7,-2991.8 1491.4,-2998.6 1493.3,-3005.7 1494.5,-3012.9
  Multi-Layer board cut-out: -255.5,-3020.2 -255.9,-3027.6 -257.1,-3034.8 -259,-3041.9 -261.7,-3048.7 -265.1,-3055.2 -269.1,-3061.3 -273.8,-3067 -279,-3072.1 -284.8,-3076.6 -291,-3080.5 -297.6,-3083.7 -304.5,-3086.2 -311.6,-3088 -318.9,-3088.9 -326.2,-3089.1 -333.6,-3088.5 -340.8,-3087.2 -347.8,-3085.1 -354.5,-3082.2 -361,-3078.7 -367,-3074.4 -372.5,-3069.6 -377.5,-3064.2 -381.8,-3058.3 -385.6,-3052 -388.6,-3045.3 -390.9,-3038.4 -392.4,-3031.2 -393.2,-3023.9 -393.2,-3016.6 -392.4,-3009.3 -390.9,-3002.1 -388.6,-2995.2 -385.6,-2988.5 -381.8,-2982.2 -377.5,-2976.3 -372.5,-2970.9 -367,-2966.1 -361,-2961.8 -354.5,-2958.3 -347.8,-2955.4 -340.8,-2953.3 -333.6,-2952 -326.2,-2951.4 -318.9,-2951.6 -311.6,-2952.5 -304.5,-2954.3 -297.6,-2956.8 -291,-2960 -284.8,-2963.9 -279,-2968.4 -273.8,-2973.5 -269.1,-2979.2 -265.1,-2985.3 -261.7,-2991.8 -259,-2998.6 -257.1,-3005.7 -255.9,-3012.9

## Nets (pads, with @x,y where several pads share a name; then routed paths per layer and width w, separated by ;. In a path a pad name is that pad's centre, name@x,y a point inside that pad or via, vN(x,y) a via of type N, cw(c..) or ccw(c..) an arc to the next point about the centre after c; other vN are vias at no path point)